# EAGLE board 00A-92 (EAGLE 6.3)
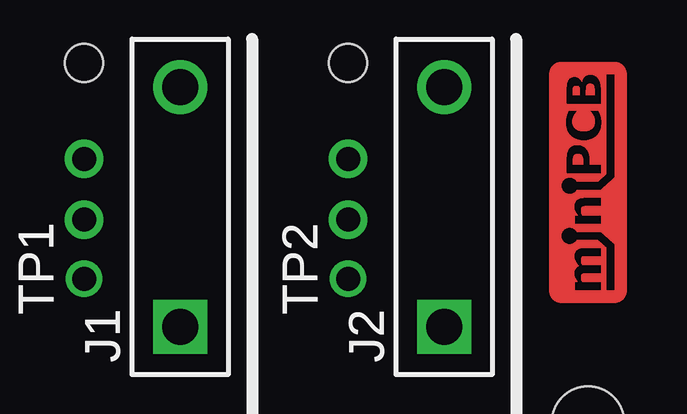
[diagram p0: board, top side]
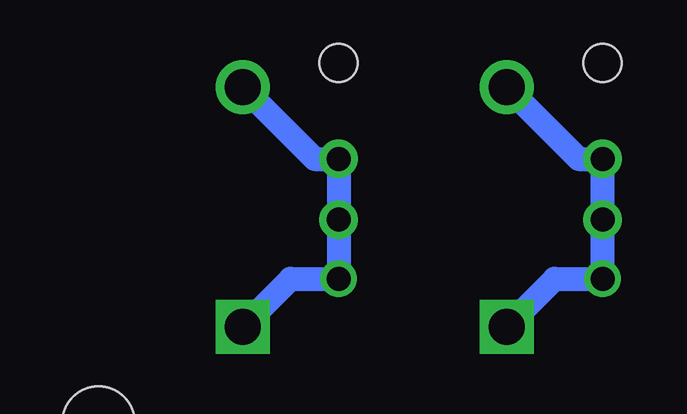
[diagram p1: board, bottom side, seen from below]

No outline drawn. Coordinates in mm, seen from the top.
Copper layers (1*16): Top 0.035mm / dielectric 1.5mm / Bottom 0.035mm
Design rules "default": minimum track width 10mil, minimum drill 0.6mm, track to track 8mil, track to pad 8mil, pad to pad 8mil, via to via 8mil, smd to smd 8mil, copper to edge 40mil, drill to drill 8mil, minimum pad ring 10mil, minimum via ring 8mil, stop-mask expansion 4mil, vias tented up to drill 0mil, thermal gap 10mil

## Footprints (pad centres in the part's own frame; a part is rotated, then mirrored left to right if it is on the bottom)
PINS_1_KE6060 = drill 1.5 square: 1 -5,0 | drill 1.5: 2 5,0
PINS_1_1MM-NOTEXT = drill 1 pad 1.6: 1 4,0; 2 6.54,0 | hole 1.6: 0,0
MINIPCB_00A_20X33 = hole 3: 30,3; 3,3
PINS_1_TESTPOINT_KE5000_NOTEXT = drill 1: 1 0,0

## Placement (x,y rotation side)
J1  [PINS_1_KE6060]  13,12 90 top
J2  [PINS_1_KE6060]  24,12 90 top
P1  [PINS_1_1MM-NOTEXT]  9,18 270 top
P2  [PINS_1_1MM-NOTEXT]  20,18 270 top
PCB1  [MINIPCB_00A_20X33]  0,0 0 top
TP1  [PINS_1_TESTPOINT_KE5000_NOTEXT]  9,9 90 top
TP2  [PINS_1_TESTPOINT_KE5000_NOTEXT]  20,9 90 top

## Library data of the parts
J1 J2 P1 P2 TP1 TP2 = minipcb
PCB1 = minipcb; PART_NUMBER: 00A-92-A1-01

## Nets
N$1: J1.1 J1.2 P1.1 P1.2 TP1.1
N$3: J2.1 J2.2 P2.1 P2.2 TP2.1

## Tracks (layer width: path | path; a pad name or v marks a point on that pad's centre or on a via)
N$1
  Bottom 1: J1.2 10,14 P1.1 P1.2 TP1.1 11,9 J1.1
N$3
  Bottom 1: J2.2 21,14 P2.1 P2.2 TP2.1 22,9 J2.1

## Text on the board
_tNames: TP1 | TP2 | J1 | J2